# Altium PCB Copy of NaiS802HD_0.6.PcbDoc (part 1 of 2)
Units mm, origin at the board's own origin, x right, y up, seen from the top; angles counter-clockwise.
Board outline 60.2 x 38 mm, 4 copper layers (Top, INT1, GND, Bottom), stack 0.965 mm thick; 171 components, 226 nets, 680 pads, 225 vias.
Unrouted connection lines stored in the file: 290.
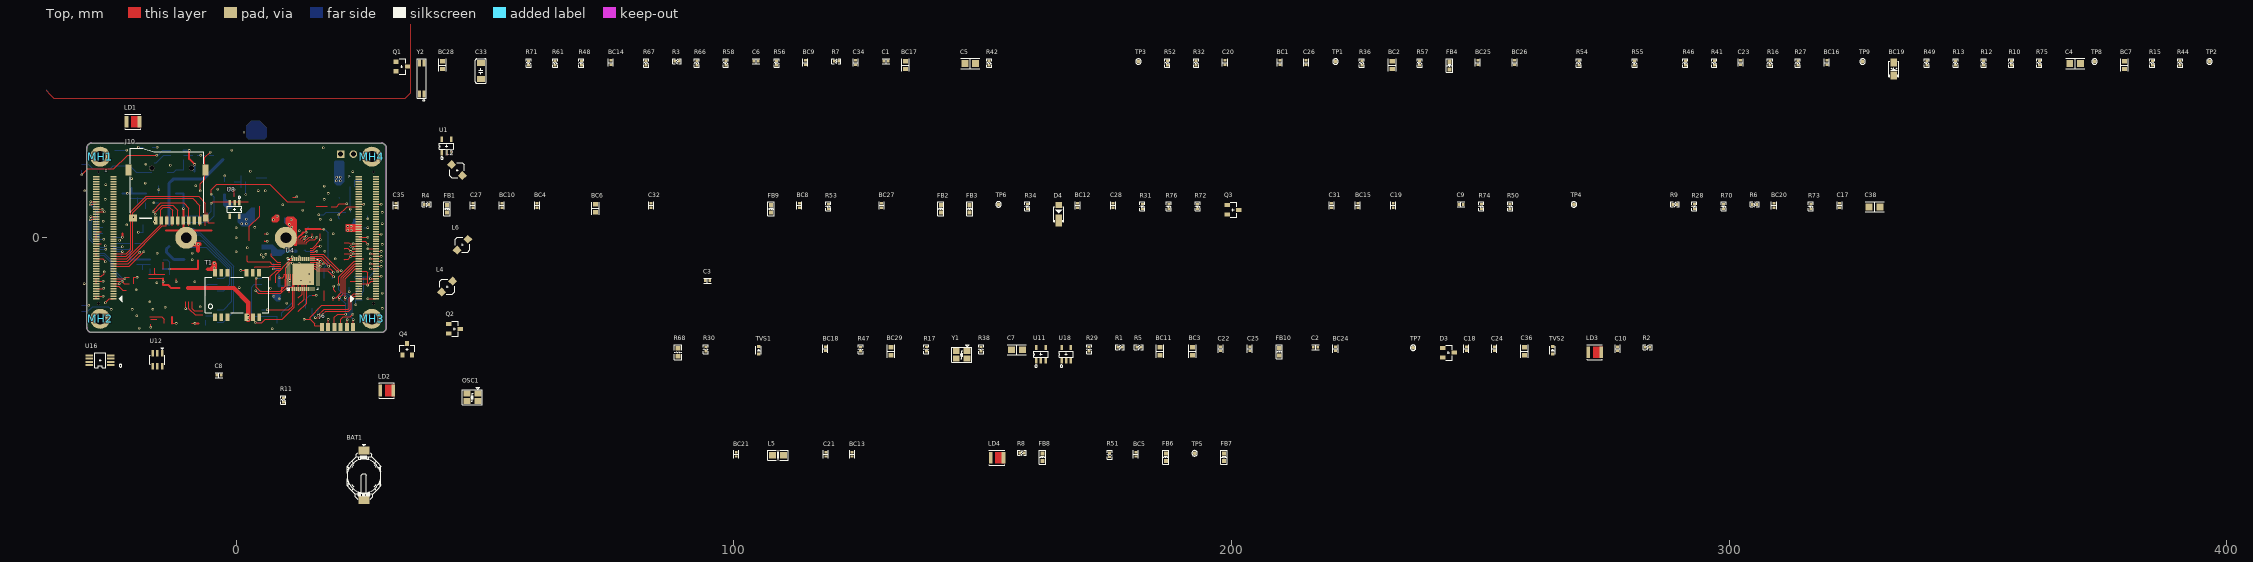
[diagram p0: Top view]
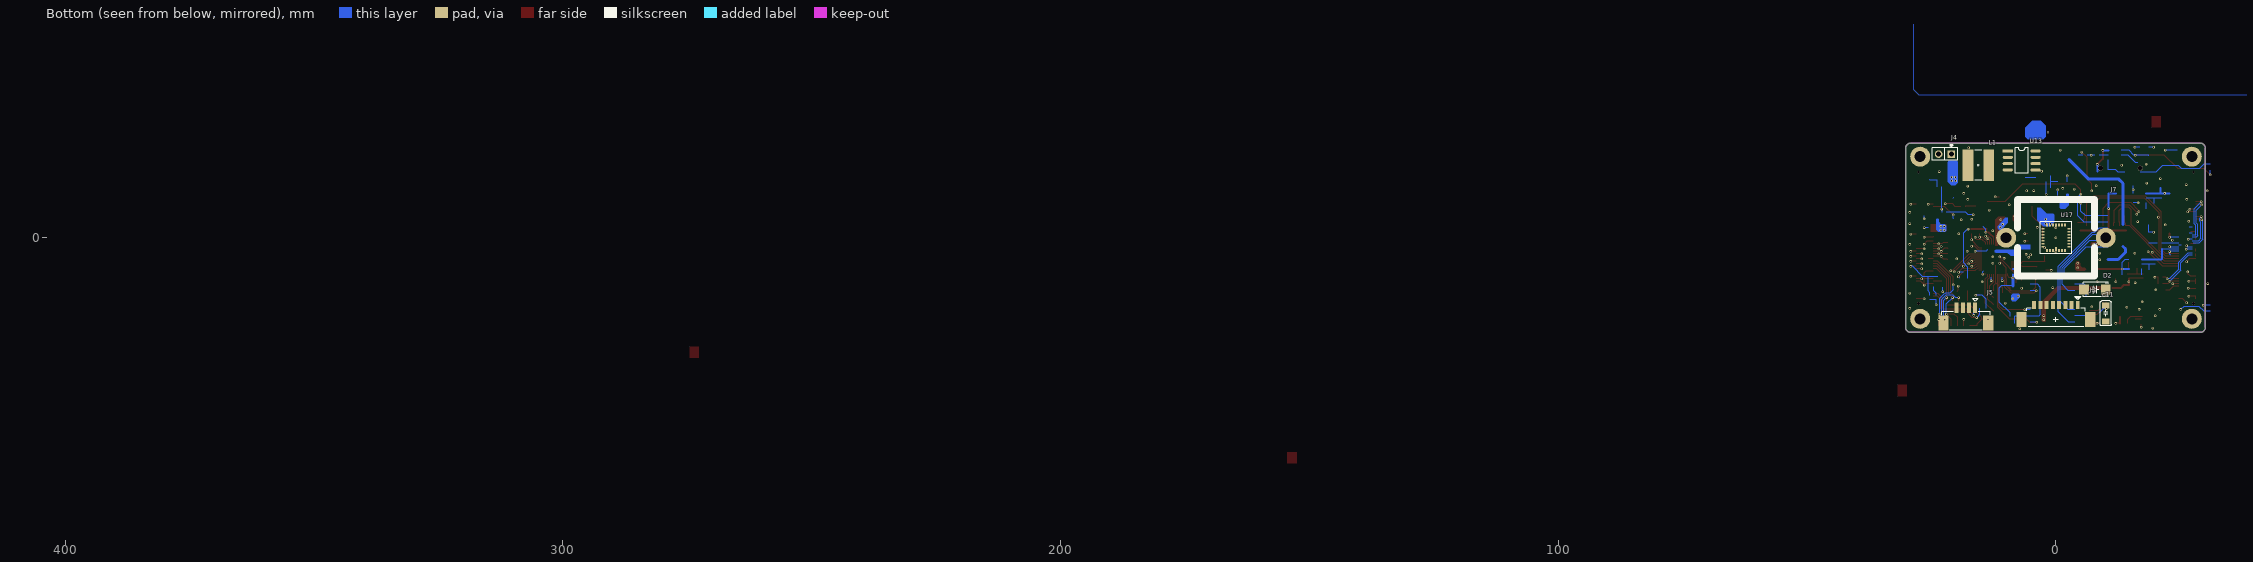
[diagram p1: Bottom view, seen from below]
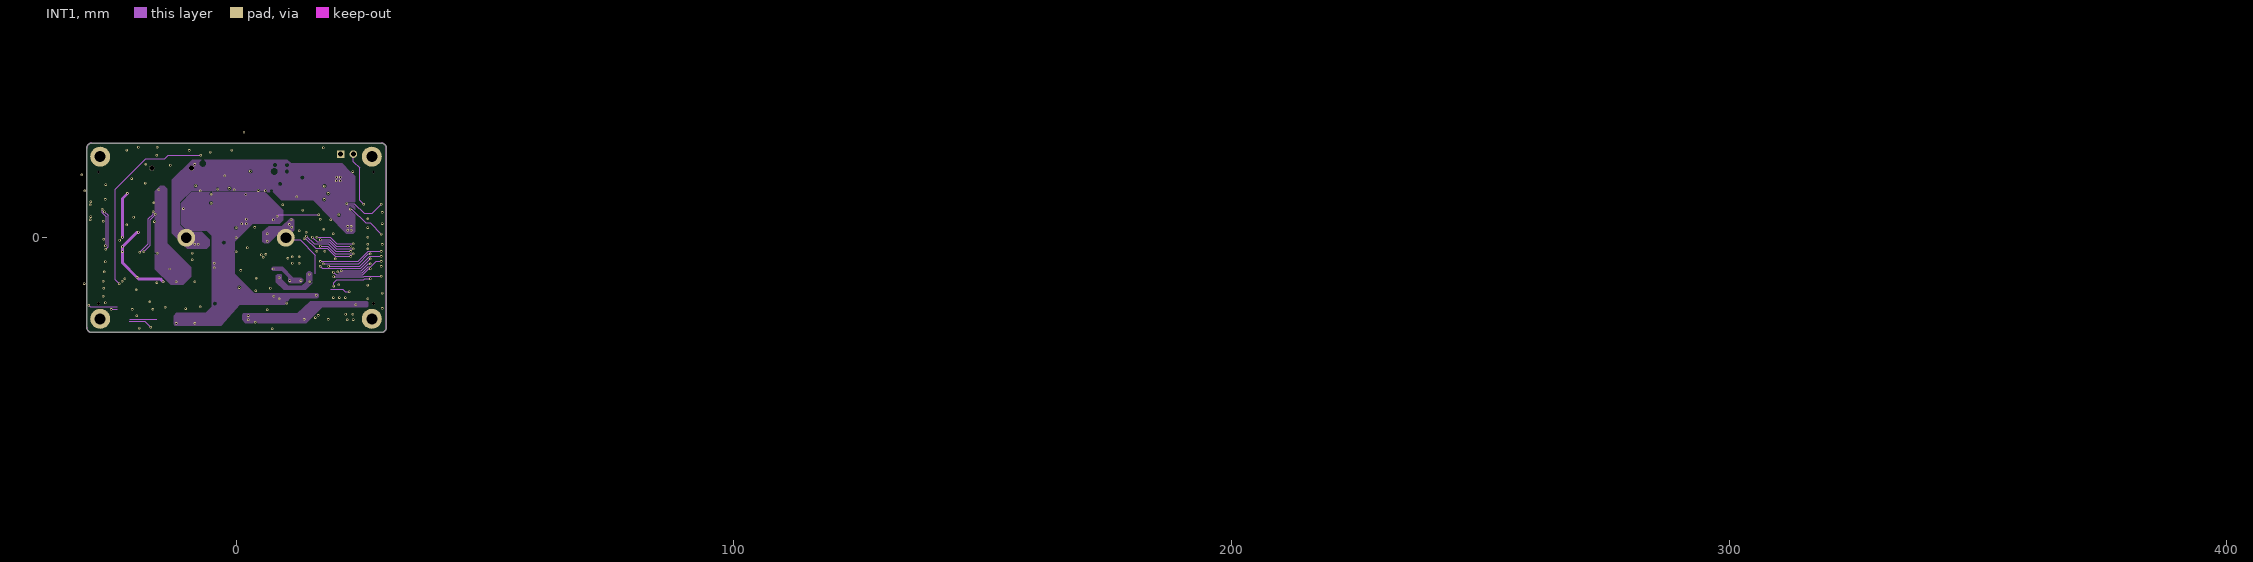
[diagram p2: INT1]

## Layer stack, top to bottom
Solder Mask Top: solder mask 0.0102, Solder Resist, Dk 3.5
Top: signal copper 0.0343
Dielectric 1: dielectric 0.254, FR-4, Dk 4.3
INT1: signal copper 0.0343
Dielectric2: dielectric 0.254, FR-4, Dk 4.3
GND: signal copper 0.0343
Dielectric4: dielectric 0.32, FR-4, Dk 4.8
Bottom: signal copper 0.0343
Solder Mask Bottom: solder mask 0.0102, Solder Resist, Dk 3.5

## Board outline
-30,-18 -30,18 cw(c-29,18) -29,19 29.2,19 cw(c29.2,18) 30.2,18 30.2,-18 cw(c29.2,-18) 29.2,-19 -29,-19 cw(c-29,-18)

## Design rules (kind name [scope] priority, off if disabled: settings)
Clearance Clearance_6 [InNet('+12V') or InNet('N21617464')] p1: gap=0.4 ignorepadtopadclearanceinfootprint=FALSE
Clearance Clearance_5 [InComponent('U4') or InComponent('J7')] p2: gap=0.16 ignorepadtopadclearanceinfootprint=FALSE
Clearance Clearance_4 [(InComponent('MH1') OR InComponent('MH2') OR InComponent('MH3') OR InComponent('MH4')) vs OnLayer('Keep-Out Layer')] p3: gap=0 ignorepadtopadclearanceinfootprint=FALSE
Clearance Clearance_3 [HasFootprint('RP-4_1005')] p4: gap=0.127 ignorepadtopadclearanceinfootprint=FALSE except(0: Arc-Hole Track-Hole SMDPad-Hole THPad-Hole Via-Hole Fill-Hole Poly-Hole Region-Hole Text-Hole)
Clearance Clearance_2 [OnLayer('Keep-Out Layer') vs InNet('GND')] p5: gap=0.1 ignorepadtopadclearanceinfootprint=FALSE except(0: Arc-Hole Track-Hole SMDPad-Hole THPad-Hole Via-Hole Fill-Hole Poly-Hole Region-Hole Text-Hole)
Clearance Clearance_1 [IsVia] p6: gap=0.1 ignorepadtopadclearanceinfootprint=FALSE except(0: Arc-Hole Track-Hole SMDPad-Hole THPad-Hole Via-Hole Fill-Hole Poly-Hole Region-Hole Text-Hole)
Clearance [All] p7: gap=0.2 ignorepadtopadclearanceinfootprint=FALSE
ComponentClearance [OnLayer('Bottom')] p1: gap=0.01 collisioncheckmode=3 verticalgap=0 showdistances=FALSE
DiffPairsRouting [All] p1: maxlimit=0.254 minlimit=0.2 mostfreqgap=0.254 toplayer_prefgap=0.2 toplayer_minwidth=0.2 toplayer_maxwidth=0.381 toplayer_prefwidth=0.254 midlayer1_mingap=0.254 midlayer1_minwidth=0.381 midlayer1_maxwidth=0.381 midlayer1_prefwidth=0.381 midlayer2_mingap=0.254 midlayer2_minwidth=0.381 midlayer2_maxwidth=0.381 midlayer2_prefwidth=0.381 bottomlayer_prefgap=0.2 bottomlayer_minwidth=0.2 bottomlayer_maxwidth=0.381 bottomlayer_prefwidth=0.254 maxuncoupledlength=12.7
HoleSize [All] p1: absolutevalues=TRUE maxlimit=5 minlimit=0.25 maxpercent=80.000 minpercent=20.000
HoleToHoleClearance [All] p1: gap=0.2 allowstackedmicrovias=TRUE
MinimumSolderMaskSliver [All] p1: minsoldermaskwidth=0
PermittedLayers [All] p1: toplayerpermitted=TRUE bottomlayerpermitted=TRUE
PlaneClearance [InNet('GND')] p1: clearance=0.508
PlaneConnect "Power Plane Connect Style - pads with no thermal" [(Name='J10-0') Or (Name='J10-0/2') Or (Name='J11-0') Or (Name='J11-0/2') Or (Name='J12-9') Or (Name='J12-10') Or (Name='J4-13') Or (Name='J4-14') Or (Name='J5-7') Or (Name='J9-15') Or (Name='J9-16') Or (Name='SW1-5') Or (Name='SW1-6')] p1: planeconnectstyle=NoConnect reliefexpansion=0.508 reliefentries=4 reliefconductorwidth=0.254 reliefairgap=0.254 // PAD - No Thermal Connect Rule
PlaneConnect [All] p2: planeconnectstyle=Relief reliefexpansion=0.508 reliefentries=4 reliefconductorwidth=0.254 reliefairgap=0.254
PolygonConnect [All] p1: connectstyle=Direct reliefconductorwidth=0.254 reliefentries=4 polygonreliefangle="90 Angle" airgapwidth=0.1
RoutingVias [All] p1: holewidth=0.25 width=0.5 viastyle="Through Hole" minholewidth=0.25 minwidth=0.5 maxholewidth=0.25 maxwidth=0.5
SilkToSilkClearance [All] p1: silktosilkclearance=0
SilkToSolderMaskClearance [IsPad] p1: minsilkscreentomaskgap=0 clearancetoexposedcopper=TRUE
SolderMaskExpansion [All] p1: expansion=0.1
Width Width_1 [(InNet('VDD_3.3V') OR InNet('AVDD') OR InNet('OVDD') OR InNet('DVDD'))] p1: maxlimit=2 minlimit=0.2 preferedwidth=2
Width [All] p2: maxlimit=1 minlimit=0.1 preferedwidth=0.2
21 further rules are at their usual default settings.

## Components (designator, comment, footprint, x,y, rotation, side; value= is the part's Value field where it differs from the comment)
BAT1 "CN048S-0005//SMD_BAT_HOLDER" BAT-CN048S 25.7,-47.7 r0 top
BC1 "0.1uF" CS-1005 209.701,35.202 r90 top
BC2 "0.1uF" CS-1608 232.301,34.702 r90 top
BC3 "1uF" CS-1608 192.201,-22.798 r90 top
BC4 "0.1uF" CS-1005 60.502,6.502 r90 top
BC5 "0.1uF" CS-1005 180.801,-43.498 r90 top
BC6 "10uF" CS-1608 72.202,5.902 r90 top
BC7 "10uF" CS-1608 379.401,34.702 r90 top
BC8 "0.1uF" CS-1005 113.202,6.502 r90 top
BC9 "0.1uF" CS-1005 114.402,35.202 r90 top
BC10 "0.1uF" CS-1005 53.402,6.502 r90 top
BC11 "10uF" CS-1608 185.601,-22.798 r90 top
BC12 "0.1uF" CS-1005 169.102,6.502 r90 top
BC13 "0.1uF" CS-1005 123.801,-43.498 r90 top
BC14 "0.1uF" CS-1005 75.302,35.202 r90 top
BC15 "0.1uF" CS-1005 225.401,6.502 r90 top
BC16 "0.1uF" CS-1005 319.601,35.202 r90 top
BC17 "10uF" CS-1608 134.502,34.702 r90 top
BC18 "1uF" CS-1005 118.401,-22.298 r90 top
BC19 "22uF" CTS-3216 333.101,33.902 r90 top
BC20 "1uF" CS-1005 309.001,6.502 r90 top
BC21 "0.1uF" CS-1005 100.501,-43.498 r90 top
BC24 "1uF" CS-1005 220.901,-22.298 r90 top
BC25 "1uF" CS-1005 249.501,35.202 r90 top
BC26 "0.1uF" CS-1005 256.901,35.202 r90 top
BC27 "0.1uF-1005" CS-1005 129.702,6.502 r90 top
BC28 "0.1uF" CS-1608 41.502,34.702 r90 top
BC29 "1uF" CS-1608 131.601,-22.798 r90 top
C1 "0.1uF" CS-1005 130.602,35.502 r0 top
C2 "1nF/NI" CS-1005 216.901,-21.998 r0 top
C3 "10nF" CS-1005 94.7,-8.6 r0 top
C4 "22uF-2012-6.3V" CS-2012 369.501,35.002 r0 top
C5 "22uF-2012-6.3V" CS-2012 147.502,35.002 r0 top
C6 "22pF" CS-1005 104.502,35.502 r0 top
C7 "22uF-6.3V" CS-2012 156.901,-22.498 r0 top
C8 "0.1uF" CS-1005 -3.45,-27.6 r0 top
C9 "0.1uF" CS-1005 246.101,6.702 r0 top
C10 "3.3nF" CS-1005 277.601,-22.298 r90 top
c11 "4.7uF-25V-3216" C3216 -10,-15.2 r270 bottom
C17 "12pF" CS-1005 322.201,6.502 r90 top
C18 "12pF" CS-1005 247.201,-22.298 r90 top
C19 "0.1uF" CS-1005 232.501,6.502 r90 top
C20 "0.1uF" CS-1005 198.702,35.202 r90 top
C21 "0.1uF" CS-1005 118.501,-43.498 r90 top
C22 "0.1uF" CS-1005 197.801,-22.298 r90 top
C23 "1uF" CS-1005 302.301,35.202 r90 top
C24 "1uF" CS-1005 252.801,-22.298 r90 top
C25 "1uF" CS-1005 203.701,-22.298 r90 top
C26 "18pF" CS-1005 215.001,35.202 r90 top
C27 "10nF" CS-1005 47.602,6.502 r90 top
C28 "22pF" CS-1005 176.202,6.502 r90 top
C31 "10nF" CS-1005 220.101,6.502 r90 top
C32 "1uF" CS-1005 83.402,6.502 r90 top
C33 "4.7uF-25V-3216" C3216 49.202,33.502 r90 top
C34 "220nF" CS-1005 124.502,35.202 r90 top
C35 "0.1uF" CS-1005 32.102,6.502 r90 top
C36 "22uF" CS-1608 258.901,-22.798 r90 top
C38 "22uF-6.3V" CS-2012 329.201,6.202 r0 top
D2 "RB051L-40" SOD-106 -7.8,-10.4 r180 bottom
D3 "BAT54A" SOT-23 243.601,-23.098 r0 top
D4 "DFLS140" PowerDI123 165.302,4.702 r90 top
FB1 "220R" LS-1608 42.402,5.802 r90 top
FB2 "220R" LS-1608 141.602,5.802 r90 top
FB3 "220R" LS-1608 147.402,5.802 r90 top
FB4 "220R" LS-1608 243.801,34.602 r90 top
FB6 "220R" LS-1608 186.801,-44.098 r90 top
FB7 "220R//NI" LS-1608 198.5,-44.098 r90 top
FB8 "220R//NI" LS-1608 162.001,-44.098 r90 top
FB9 "220R//NI" LS-1608 107.502,5.802 r90 top
FB10 "220R//NI" LS-1608 209.601,-22.898 r90 top
J1 "LB222-G100S-BOR" ? 26.37,0 r180 top locked
J2 "LB208-G100P-BOR" BTB2X50-050-M-SMD -26.37,0 r180 top locked
J3 "12505WR-08" 12505WR-8P 0,-15 r180 bottom
J4 "PH-2PSM//NI" PH-2PSM 22.3,16.8 r270 bottom
J5 "12505WR-4P" 12505WS-4P 18.1,-15.6 r180 bottom
J6 "6pin 2.54mm//NI" TP_HEADER_6 20.375,-17.9 r0 top
J7 "Lens Holder" LENS_HOLDER_C_SQUARE 0,0 r180 bottom
J10 "112J-TXAR-R" CON_u-SD -16.11,3.487 r0 top
L1 "CDRH5D18NP-100NC-10uH" CDRH5D18NP 15.6,14.6 r180 bottom
L2 "CDRH2D14NP-2R2NC" CDRH2D14NP 44.4,13.6 r90 top
L4 "2.2uH/2.6A" CDRH2D14NP 42.4,-9.8 r0 top
L5 "10uH" LS-2012 108.901,-43.698 r0 top
L6 "CDRH2D14NP-2R2NC" CDRH2D14NP 45.5,-1.4 r0 top
LD1 "LED3030" LED-3030 -20.7,23.3 r0 top
LD2 "LED3030" LED-3030 30.3,-30.7 r0 top
LD3 "LED3030" LED-3030 273.001,-22.998 r0 top
LD4 "LED3030" LED-3030 152.901,-44.198 r0 top
MH1 "4.04pi" VA-2.2 -27.29,16.29 r0 top locked
MH2 "4.04pi" VA-2.2 -27.29,-16.29 r0 top locked
MH3 "4.04pi" VA-2.2 27.29,-16.29 r0 top locked
MH4 "4.04pi" VA-2.2 27.29,16.29 r0 top locked
OSC1 "24Mhz-SX32-1.8V" SX-32 47.5,-32 r0 top
Q1 "MMBT6427" SOT-23 33.302,34.402 r0 top
Q2 "MMBT6427" SOT-23 43.9,-18.3 r0 top
Q3 "MMBT6427" SOT-23 200.302,5.602 r0 top
Q4 "MMBT6427" SOT-23 34.4,-22.4 r90 top
R1 "2K" RS-1005 177.601,-21.998 r0 top
R2 "2K" RS-1005 283.601,-21.998 r0 top
R3 "10K" RS-1005 88.602,35.502 r0 top
R4 "10K" RS-1005 38.302,6.702 r0 top
R5 "10K" RS-1005 181.401,-21.998 r0 top
R6 "10K" RS-1005 305.101,6.702 r0 top
R7 "0" RS-1005 120.602,35.502 r0 top
R8 "4.7K" RS-1005 157.901,-43.198 r0 top
R9 "4.7K" RS-1005 289.101,6.702 r0 top
R10 "4.7K" RS-1005 356.701,35.102 r90 top
R11 "100K" RS-1005 9.5,-32.6 r90 top
R12 "45K_1%" RS-1005 351.101,35.102 r90 top
R13 "150K, 1%" RS-1005 345.501,35.102 r90 top
R15 "33.3K, 1%" RS-1005 385.001,35.102 r90 top
R16 "2.2K" RS-1005 308.201,35.102 r90 top
R17 "10K_1%" RS-1005 138.701,-22.398 r90 top
R27 "4.7K" RS-1005 313.801,35.102 r90 top
R28 "4.7K" RS-1005 293.001,6.302 r90 top
R29 "4.7K" RS-1005 171.401,-22.398 r90 top
R30 "4.7K" RS-1005 94.401,-22.398 r90 top
R31 "4.7K" RS-1005 182.102,6.302 r90 top
R32 "2.49K/1%" RS-1005 192.902,35.102 r90 top
R34 "4.7K" RS-1005 159.002,6.302 r90 top
R36 "4.7K" RS-1005 226.201,35.102 r90 top
R38 "4.7K" RS-1005 149.701,-22.398 r90 top
R41 "10K" RS-1005 297.001,35.102 r90 top
R42 "4.7K" RS-1005 151.302,35.102 r90 top
R44 "40.2K" RS-1005 390.601,35.102 r90 top
R46 "10K" RS-1005 291.201,35.102 r90 top
R47 "10K" RS-1005 125.501,-22.398 r90 top
R48 "4.7K" RS-1005 69.402,35.102 r90 top
R49 "NC" RS-1005 339.701,35.102 r90 top
R50 "4.7K" RS-1005 256.001,6.302 r90 top
R51 "75" RS-1005 175.501,-43.598 r90 top
R52 "75" RS-1005 187.102,35.102 r90 top
R53 "4.7K" RS-1005 119.002,6.302 r90 top
R54 "4.7K" RS-1005 269.801,35.102 r90 top
R55 "22" RS-1005 281.001,35.102 r90 top
R56 "36.5K_F" RS-1005 108.602,35.102 r90 top
R57 "30.1K_F" RS-1005 237.801,35.102 r90 top
R58 "150K, 1%" RS-1005 98.402,35.102 r90 top
R61 "75K,1%" RS-1005 64.102,35.102 r90 top
R66 "30.1K_F" RS-1005 92.602,35.102 r90 top
R67 "33" RS-1005 82.402,35.102 r90 top
R68 "1_F" RS-1608 88.801,-22.998 r90 top
R70 "10.2K/1%" RS-1005 298.901,6.302 r90 top
R71 "10K" RS-1005 58.802,35.102 r90 top
R72 "10K" RS-1005 193.202,6.302 r90 top
R73 "10K" RS-1005 316.401,6.302 r90 top
R74 "10K" RS-1005 250.201,6.302 r90 top
R75 "10K" RS-1005 362.301,35.102 r90 top
R76 "10K" RS-1005 187.402,6.302 r90 top
T1 "TRC41604NL" TRC41604NL 0.2,-11.5 r0 top
TP1 "TPS" TP_0.8_SMD 220.901,35.402 r90 top
TP2 "TPS" TP_0.8_SMD 396.501,35.402 r90 top
TP3 "TPS" TP_0.8_SMD 181.302,35.402 r90 top
TP4 "TPS" TP_0.8_SMD 268.801,6.702 r90 top
TP5 "TPS" TP_0.8_SMD 192.601,-43.298 r90 top
TP6 "TPS" TP_0.8_SMD 153.202,6.702 r90 top
TP7 "TPS" TP_0.8_SMD 236.501,-22.098 r90 top
TP8 "TPS" TP_0.8_SMD 373.401,35.402 r90 top
TP9 "TPS" TP_0.8_SMD 326.801,35.402 r90 top
TVS1 "ESD5B5.0ST1G" SOD-523 105.001,-22.598 r90 top
TVS2 "ESD5B5.0ST1G" SOD-523 264.501,-22.598 r90 top
U1 "AME5253-AEVADJ" SOT-23-5P 42.3,18.4 r0 top
U4 "YT8521SH" QFN48_6x6 13.5,-7.3 r90 top
U8 "SGM2036-2.8YN5G/TR" SOT-23-5P -0.3,5.7 r180 top
U11 "SGM2036-1.2YN5G/TR" SOT-23-5P 161.701,-23.398 r0 top
U12 "TPS61165DBVR" SOT23-6 -15.8,-24.5 r0 top
U13 "MP1482" SOIC-8 6.9,15.5 r270 bottom
U16 "DS1339U-33" TSSOP8-M -27.3,-24.6 r90 top
U17 "IMX219PLCC" IMX219PLCC 0,0 r180 bottom
U18 "AME5253-AEVADJ" SOT-23-5P 166.801,-23.398 r0 top
Y1 "25MHz-S20P-SX32" SX-32 145.801,-23.498 r0 top
Y2 "32.768KHz-MC-146-7pF" XTS-MC-146 37.302,32.002 r90 top

## Footprints (in the part's own frame and the unit in brackets; to place one, negate y for a bottom-side part, rotate by r counter-clockwise, add the part's x,y. Pads: shape width x height; smd on the part's side, far side on the other; paste and mask are expansions set on the pad)
12505WR-8P [mm]
  rect 0.8x1.6 smd: 1(4.375,1.45) 2(3.125,1.45) 3(1.875,1.45) 4(0.625,1.45) 5(-0.625,1.45) 6(-1.875,1.45) 7(-3.125,1.45) 8(-4.375,1.45)
  rect 2.1x3 smd: 9(-6.925,-1.45) 10(6.925,-1.45)
  silkscreen extent -5.87,-2.85 5.87,3.12
12505WS-4P [mm]
  rect 0.8x2.1 smd: 1(1.875,1.55) 2(0.625,1.55) 3(-0.625,1.55) 4(-1.875,1.55)
  rect 2.1x3 smd: 5(-4.5,-1.55) 6(4.5,-1.55)
  silkscreen extent -4.87,-2.95 4.87,3.3
BAT-CN048S [mm]
  rect 2.2x1.6 smd: 1(0,4.975) 2(0,-4.975)
  silkscreen extent -3.4,-4.85 3.4,6.25, body extent -3.39,-5.22 3.31,5.18, height 2.8
BTB2X50-050-M-SMD [mm]
  rect 1.25x0.3 smd: 1(-1.725,12.25) 2(1.725,12.25) 3(-1.725,11.75) 4(1.725,11.75) 5(-1.725,11.25) 6(1.725,11.25) 7(-1.725,10.75) 8(1.725,10.75) 9(-1.725,10.25) 10(1.725,10.25) 11(-1.725,9.75) 12(1.725,9.75) 13(-1.725,9.25) 14(1.725,9.25) 15(-1.725,8.75) 16(1.725,8.75) 17(-1.725,8.25) 18(1.725,8.25) 19(-1.725,7.75) 20(1.725,7.75) 21(-1.725,7.25) 22(1.725,7.25) 23(-1.725,6.75) 24(1.725,6.75) 25(-1.725,6.25) 26(1.725,6.25) 27(-1.725,5.75) 28(1.725,5.75) 29(-1.725,5.25) 30(1.725,5.25) 31(-1.725,4.75) 32(1.725,4.75) 33(-1.725,4.25) 34(1.725,4.25) 35(-1.725,3.75) 36(1.725,3.75) 37(-1.725,3.25) 38(1.725,3.25) 39(-1.725,2.75) 40(1.725,2.75) 41(-1.725,2.25) 42(1.725,2.25) 43(-1.725,1.75) 44(1.725,1.75) 45(-1.725,1.25) 46(1.725,1.25) 47(-1.725,0.75) 48(1.725,0.75) 49(-1.725,0.25) 50(1.725,0.25) 51(-1.725,-0.25) 52(1.725,-0.25) 53(-1.725,-0.75) 54(1.725,-0.75) 55(-1.725,-1.25) 56(1.725,-1.25) 57(-1.725,-1.75) 58(1.725,-1.75) 59(-1.725,-2.25) 60(1.725,-2.25) 61(-1.725,-2.75) 62(1.725,-2.75) 63(-1.725,-3.25) 64(1.725,-3.25) 65(-1.725,-3.75) 66(1.725,-3.75) 67(-1.725,-4.25) 68(1.725,-4.25) 69(-1.725,-4.75) 70(1.725,-4.75) 71(-1.725,-5.25) 72(1.725,-5.25) 73(-1.725,-5.75) 74(1.725,-5.75) 75(-1.725,-6.25) 76(1.725,-6.25) 77(-1.725,-6.75) 78(1.725,-6.75) 79(-1.725,-7.25) 80(1.725,-7.25) 81(-1.725,-7.75) 82(1.725,-7.75) 83(-1.725,-8.25) 84(1.725,-8.25) 85(-1.725,-8.75) 86(1.725,-8.75) 87(-1.725,-9.25) 88(1.725,-9.25) 89(-1.725,-9.75) 90(1.725,-9.75) 91(-1.725,-10.25) 92(1.725,-10.25) 93(-1.725,-10.75) 94(1.725,-10.75) 95(-1.725,-11.25) 96(1.725,-11.25) 97(-1.725,-11.75) 98(1.725,-11.75) 99(-1.725,-12.25) 100(1.725,-12.25)
  round 0.5 hole 0.6: 1(1.25,13.2) 1(1.25,-13.2)
  silkscreen extent -3.47,11.65 -2.88,12.85
C3216 [mm]
  rect 1.2x1.6 smd: 1(-1.6,0) 2(1.6,0)
  silkscreen extent -2.5,-1.1 2.5,1.1
CDRH2D14NP [mm]
  rect 1.3x1.3 smd rot 45: 1(1.1,1.1) 2(-1.1,-1.1)
  Top pour cut-out: -1.484,1.116 -1.504,-0.621 -0.625,-1.5 1.025,-1.5 1.5,-1.025 1.5,0.7 0.7,1.5 -1.1,1.5
  silkscreen extent -1.5,-1.5 1.5,1.5
CDRH5D18NP [mm]
  rect 2.15x6.3 smd: 1(2.075,0) 2(-2.075,0)
  silkscreen extent -0.7,-3 0.7,3
CON_u-SD [mm]
  rect 0.7x1.6 smd: 1(0,0) 2(1.105,0) 3(2.201,0) 4(3.303,0) 5(4.407,0) 6(5.504,0) 7(6.6,0) 8(7.705,0) CD(8.801,0)
  rect 1.1x1.4 smd: 9(10.006,0.499)
  rect 1.6x1.4 smd: 10(-4.596,0.508)
  rect 1.2x2.2 smd: 11(10.012,10.108) 12(-5.497,10.108)
  round 1 hole 1: 13(7.198,10.509) 14(-0.79,10.513)
  silkscreen extent -5.1,0.48 9.6,14.51
CS-1005 [mm]
  rect 0.5x0.6 smd: 1(-0.45,0) 2(0.45,0)
  silkscreen extent -0.76,-0.51 0.76,0.51
CS-1608 [mil]
  rect 35x40 smd: 1(-31.5,0) 2(31.5,0)
  silkscreen extent -50,-30 50,30
CS-2012 [mil]
  rect 55x55 smd: 1(-42.5,0) 2(42.5,0)
  silkscreen extent -75,-40 75,40
CTS-3216 [mil]
  rect 63x51 smd: 1(-50,0) 2(50,0)
  silkscreen extent -63,-39 63,39
IMX219PLCC [mm]
  rect 0.35x1 smd: 1(0,-2.4)
  rect 0.35x0.6 smd: 2(0.6,-2.6) 3(1.2,-2.6) 4(1.8,-2.6) 12(1.8,2.6) 13(1.2,2.6) 14(0.6,2.6) 15(0,2.6) 16(-0.6,2.6) 17(-1.2,2.6) 18(-1.8,2.6) 26(-1.8,-2.6) 27(-1.2,-2.6) 28(-0.6,-2.6)
  rect 0.6x0.35 smd: 5(2.65,-1.8) 6(2.65,-1.2) 7(2.65,-0.6) 8(2.65,0) 9(2.65,0.6) 10(2.65,1.2) 11(2.65,1.8) 19(-2.65,1.8) 20(-2.65,1.2) 21(-2.65,0.6) 22(-2.65,0) 23(-2.65,-0.6) 24(-2.65,-1.2) 25(-2.65,-1.8)
  silkscreen extent -3.2,-3.25 3.2,3.25
LED-3030 [mm]
  rect 0.725x2.35 smd: 1(-1.3,0) 2(1.3,0)
  Top region: -0.375,-1.175 1.55,-1.175 1.55,1.175 -0.375,1.175
  silkscreen extent -1.53,-1.53 1.53,1.53
LENS_HOLDER_C_SQUARE [mm]
  round 4 / inner round 3.6 / far side round 4.4 hole 2.2: 1(-10,0) 2(10,0)
  silkscreen extent -7.7,-7.7 7.7,7.7
LS-1608 [mil]
  rect 32x32 smd: 1(-30,0) 2(30,0)
  silkscreen extent -55,-25 55,25
LS-2012 [mil]
  rect 55x55 smd: 1(-42.5,0) 2(42.5,0)
  silkscreen extent -80,-40 80,40
PH-2PSM [mil]
  rect 60x60 hole 39.37: 1(0,50)
  round 60 hole 39.37: 2(0,-50)
  silkscreen extent -80,-100 50,100
PowerDI123 [mm]
  rect 1.2x1.25 smd: 1(1.85,0)
  rect 2.4x1.25 smd: 2(-1.225,0)
  silkscreen extent -1.45,-0.97 1.55,0.98
QFN48_6x6 [mm]
  rrect0% 0.8x0.22 smd: 1(-3,2.2) 2(-3,1.8) 3(-3,1.4) 4(-3,1) 5(-3,0.6) 6(-3,0.2) 7(-3,-0.2) 8(-3,-0.6) 9(-3,-1) 10(-3,-1.4) 11(-3,-1.8) 12(-3,-2.2) 25(3,-2.2) 26(3,-1.8) 27(3,-1.4) 28(3,-1) 29(3,-0.6) 30(3,-0.2) 31(3,0.2) 32(3,0.6) 33(3,1) 34(3,1.4) 35(3,1.8) 36(3,2.2)
  rrect0% 0.22x0.8 smd: 13(-2.2,-3) 14(-1.8,-3) 15(-1.4,-3) 16(-1,-3) 17(-0.6,-3) 18(-0.2,-3) 19(0.2,-3) 20(0.6,-3) 21(1,-3) 22(1.4,-3) 23(1.8,-3) 24(2.2,-3) 37(2.2,3) 38(1.8,3) 39(1.4,3) 40(1,3) 41(0.6,3) 42(0.2,3) 43(-0.2,3) 44(-0.6,3) 45(-1,3) 46(-1.4,3) 47(-1.8,3) 48(-2.2,3)
  rect 4.3x4.3 smd: M1(0,0)
  silkscreen extent -3.22,-3 3,3.22
RS-1005 [mm]
  rect 0.5x0.6 smd: 1(-0.45,0) 2(0.45,0)
  silkscreen extent -0.89,-0.51 0.89,0.51
RS-1608 [mil]
  rect 35x40 smd: 1(-31.5,0) 2(31.5,0)
  silkscreen extent -60,-30 60,30
SOD-106 [mm]
  rrect0% 2x2 smd: 1(-2.2,0) 2(2.2,0)
  silkscreen extent -2.3,-1.45 2.7,1.45
SOD-523 [mm]
  rect 0.6x0.7 smd: 1(0.71,0) 2(-0.71,0)
  silkscreen extent -0.8,-0.55 0.8,0.55
SOIC-8 [mil]
  rect 24x80 smd: 1(-76.34,-109.45)
  oval 24x80 smd: 2(-26.34,-109.45) 3(23.66,-109.45) 4(73.66,-109.45) 5(73.66,110.55) 6(23.66,110.55) 7(-26.34,110.55) 8(-76.34,110.55)
  silkscreen extent -101,-49 99,51
SOT23-6 [mm]
  rect 0.508x1.27 smd: 1(0.95,1.3) 2(0,1.3) 3(-0.95,1.3) 4(-0.95,-1.3) 5(0,-1.3) 6(0.95,-1.3)
  silkscreen extent -1.52,-0.89 1.52,2.4
SOT-23 [mil]
  rect 42x32 smd: 1(-45.45,37.75) 2(-45.45,-37.35) 3(44.85,0.2)
  silkscreen extent -20,-60 30,60
SOT-23-5P [mm]
  rect 0.5x1.1 smd: 1(-0.95,-1.35) 2(0,-1.35) 3(0.95,-1.35) 4(0.95,1.35) 5(-0.95,1.35)
  silkscreen extent -1.45,-2.65 1.45,0.6
SX-32 [mm]
  rect 1.4x1.2 smd: 1(1.1,0.75) 2(-1.1,0.75) 3(-1.1,-0.75) 4(1.1,-0.75)
  silkscreen extent -2,-1.5 2,2
TP_0.8_SMD [mm]
  round 0.8 smd: 1(0,0)
  silkscreen extent -0.56,-0.56 0.56,0.56
TP_HEADER_6 [mm]
  rect 0.8x1.6 smd: 1(-3.125,0) 2(-1.875,0) 3(-0.625,0) 4(0.625,0) 5(1.875,0) 6(3.125,0)
TRC41604NL [mm]
  rect 0.76x1.52 smd: 1(-4.436,-4.445) 2(-3.168,-4.445) 3(-1.898,-4.445) 6(1.912,-4.445) 7(3.182,-4.445) 8(4.452,-4.445) 9(4.438,4.445) 10(3.168,4.445) 11(1.898,4.445) 14(-1.912,4.445) 15(-3.182,4.445) 16(-4.452,4.445)
  silkscreen extent -6.35,-3.56 6.35,3.56
TSSOP8-M [mm]
  rect 0.4x1.5 smd: 1(-0.975,-2.15) 2(-0.325,-2.15) 3(0.325,-2.15) 4(0.975,-2.15) 5(0.975,2.15) 6(0.325,2.15) 7(-0.325,2.15) 8(-0.975,2.15)
  silkscreen extent -1.5,-4.38 1.5,1.1
VA-2.2 [mm]
  rrect100% 4x4 hole 2.2: 1(0,0)
XTS-MC-146 [mm]
  rect 1.4x0.6 smd: 1(-3.15,-0.42) 2(3.15,-0.42) 3(3.15,0.42) 4(-3.15,0.42)
  silkscreen extent -4.5,-0.9 4,0.9
? [mm]
  rect 1.25x0.3 smd: 1(1.725,12.25) 2(-1.725,12.25) 3(1.725,11.75) 4(-1.725,11.75) 5(1.725,11.25) 6(-1.725,11.25) 7(1.725,10.75) 8(-1.725,10.75) 9(1.725,10.25) 10(-1.725,10.25) 11(1.725,9.75) 12(-1.725,9.75) 13(1.725,9.25) 14(-1.725,9.25) 15(1.725,8.75) 16(-1.725,8.75) 17(1.725,8.25) 18(-1.725,8.25) 19(1.725,7.75) 20(-1.725,7.75) 21(1.725,7.25) 22(-1.725,7.25) 23(1.725,6.75) 24(-1.725,6.75) 25(1.725,6.25) 26(-1.725,6.25) 27(1.725,5.75) 28(-1.725,5.75) 29(1.725,5.25) 30(-1.725,5.25) 31(1.725,4.75) 32(-1.725,4.75) 33(1.725,4.25) 34(-1.725,4.25) 35(1.725,3.75) 36(-1.725,3.75) 37(1.725,3.25) 38(-1.725,3.25) 39(1.725,2.75) 40(-1.725,2.75) 41(1.725,2.25) 42(-1.725,2.25) 43(1.725,1.75) 44(-1.725,1.75) 45(1.725,1.25) 46(-1.725,1.25) 47(1.725,0.75) 48(-1.725,0.75) 49(1.725,0.25) 50(-1.725,0.25) 51(1.725,-0.25) 52(-1.725,-0.25) 53(1.725,-0.75) 54(-1.725,-0.75) 55(1.725,-1.25) 56(-1.725,-1.25) 57(1.725,-1.75) 58(-1.725,-1.75) 59(1.725,-2.25) 60(-1.725,-2.25) 61(1.725,-2.75) 62(-1.725,-2.75) 63(1.725,-3.25) 64(-1.725,-3.25) 65(1.725,-3.75) 66(-1.725,-3.75) 67(1.725,-4.25) 68(-1.725,-4.25) 69(1.725,-4.75) 70(-1.725,-4.75) 71(1.725,-5.25) 72(-1.725,-5.25) 73(1.725,-5.75) 74(-1.725,-5.75) 75(1.725,-6.25) 76(-1.725,-6.25) 77(1.725,-6.75) 78(-1.725,-6.75) 79(1.725,-7.25) 80(-1.725,-7.25) 81(1.725,-7.75) 82(-1.725,-7.75) 83(1.725,-8.25) 84(-1.725,-8.25) 85(1.725,-8.75) 86(-1.725,-8.75) 87(1.725,-9.25) 88(-1.725,-9.25) 89(1.725,-9.75) 90(-1.725,-9.75) 91(1.725,-10.25) 92(-1.725,-10.25) 93(1.725,-10.75) 94(-1.725,-10.75) 95(1.725,-11.25) 96(-1.725,-11.25) 97(1.725,-11.75) 98(-1.725,-11.75) 99(1.725,-12.25) 100(-1.725,-12.25)
  round 0.5 hole 0.6: M1(-1.25,-13.2) M2(-1.25,13.2)
  silkscreen extent 2.75,11.67 3.35,12.87

## Via types
v1: diameter 0.5, hole 0.25, Top to Bottom, 225 vias

## Nets (pads, with @x,y where several pads share a name; then routed paths per layer and width w, separated by ;. In a path a pad name is that pad's centre, name@x,y a point inside that pad or via, vN(x,y) a via of type N, cw(c..) or ccw(c..) an arc to the next point about the centre after c; other vN are vias at no path point)
1.8VCORE: FB10.2 J2.14 J2.16 J2.18 TP2.1 | length 2.4
  Top w0.2: J2.14@-28.095,-9.25 J2.16@-28.095,-8.75 ; J2.18@-28.095,-8.25 J2.16@-28.095,-8.75 ; v1(-26.724,-8.75) J2.16@-28.095,-8.75
1V2: BC25.2 C24.2 U11.5 U17.27
1V8: BC18.2 BC24.2 C23.2 FB8.1 OSC1.4 R53.1 R54.1 R56.2 U17.25 | length 0.1
  Top w0.2: v1(2.3,-2) v1@2.351,-2
1V8_IO67: J1.68
1V8_IO68: J1.70
1V8_IO72: J1.72
1V8_IO73: J1.74
1V8_IO74: J1.76
1V8_IO82: J1.66
1V8_IO92: J2.59
1V8_IO93: J2.61
1V8_IO94: J2.51
1V8_IO95: J2.53
1V8_IO96: J2.57
1V8_IO104: J2.30
1V8_IO105: J2.32
1V8_IO106: J2.26
1V8_IO107: J2.28
1V8_IO118: J2.19
1V8_IO119: J2.21
2V8: BC19.1 BC20.2 C25.2 U8.5 U17.16
3.3VCORE: FB9.2 J2.2 J2.4 TP1.1 | length 1.9
  Top w0.2: J2.2@-28.095,-12.25 J2.4@-28.095,-11.75 v1(-26.724,-11.75)
3V3_IO114: J1.11
3V3_IO115: J1.9
3V3_IO124: J2.9
3V3_IO125: J2.7
3V3_IO126: J2.5
3V3_IO127: J2.3
+1.8V: BC1.1 BC29.2 C28.1 C38.1 FB8.2 FB10.1 J6.1 L6.2 R6.2 R8.2 R9.2 R10.2 R41.1 R46.1 R47.1 R58.2 | length 12.9
  Top w0.2: v1(13.675,-16.415) 14.887,-16.415 ; J6.1@17.275,-17.7 17.266,-17.709 15.775,-17.709 15.775,-17.304 14.887,-16.415 ; 21.978,-13.567 17.242,-13.567 14.887,-15.922 14.887,-16.415
+3.3V: BC3.2 BC27.2 C6.1 C7.1 C35.1 C36.1 FB1.1 FB2.1 FB7.1 FB9.1 J5.1 J10.4 L2.2 R13.2 R44.1 R66.2 R70.2 R71.2 R72.2 R73.2 R74.2 R75.2 R76.2 TVS1.1 U16.8
+5.0V: BC2.2 BC28.2 C4.1 C5.1 C32.1 FB6.1 J1.55 J1.57 J1.59 J1.61 L1.2 L5.2 R1.2 R2.2 R12.1 U1.1 U1.4 U12.1 U18.1 U18.4
  other v1: 22.435,1.53 23.12,1.53 22.435,2.28 23.12,2.28
+12V: C8.1 c11.1 D2.2 R11.1 U13.2 | length 3.1
  Top w0.2: v1(-10.129,-14.222) -10.129,-12.875
  Bottom w0.2: v1(-10.129,-14.222) -9.475,-14.222 -8.775,-14.922 -8.775,-15.025
ADCOUT_C: J2.60
AVDD33: BC7.1 BC8.1 BC9.1 FB2.2 R49.1 U4.1 U4.12
AVDDL_1V2: BC14.1 BC15.1 BC16.1 FB4.2 U4.4 U4.9 U4.47
BCLK_C: J2.63
BOOT_CTL0: J1.79
BOOT_CTL1: D3.2 J1.77 J4.2 | length 11.9
  Top w0.2: J1.77@24.645,6.75 v1(25.645,6.75)
  INT1 w0.2: J4.2@23.57,16.8 23.57,15.312 24.836,14.046 24.836,7.559 v1(25.645,6.75)
BT_RST_IN: J1.50
BT_UART_RX: J2.22
BT_UART_TX: J2.24
BT_WAKE_IN: J1.62
BT_WAKE_OUT: J1.64
CFG_LED1: R3.2 R50.1 U4.36
CFG_LED2: R5.2 R48.2 U4.37
DACIN_C: J2.58
DRIVE_WS2812_3V3: J2.13 R66.1 R67.2 | length 42
  Top w0.2: J2.13@-24.645,-9.25 v1@-23.448,-9.25
  INT1 w0.2: v1(-23.456,-9.258) -24.238,-8.475 -24.238,9.756 -18.105,15.889 -14.289,15.889 -13.578,16.6 v1(-7.095,16.6)
  Bottom w0.2: -7.772,16.6 v1(-7.095,16.6) -6.259,16.6
DVDD33: BC4.1 BC5.1 BC6.1 FB1.2 R48.1 R50.2 U4.30 U4.31
DVDD_RGMII: BC10.1 BC11.1 R27.1 R28.1 R30.1 R42.2 U4.29
DVDDL: BC12.1 FB3.2 U4.22
DVP_D0: J1.91
DVP_D1: J1.94
DVP_D2: J1.93
DVP_D3: J1.82
DVP_D4: J1.86
DVP_D5: J1.96
DVP_D6: J1.95
DVP_D7: J1.84
DVP_D8: J1.98
DVP_D9: J1.97
DVP_D10: J1.100
DVP_D11: J1.88
DVP_D12: J1.92
DVP_D13: J1.90
DVP_D14: J1.99
DVP_D15: J1.81
DVP_DEN: J1.87
DVP_HREF: J1.85
DVP_PCLK: J1.89
DVP_VSYNC: J1.83
EPHY_TRCT: C20.1 R49.2 T1.2 T1.7
ETH_INTB: J1.28 Q3.3 R41.2 | length 11.3
  Top w0.2: J1.28@28.095,-5.75 v1(29.2,-5.75)
  Bottom w0.2: 23.756,-7.796 25.654,-7.796 ; 25.312,-11.568 25.312,-11.021 25.654,-10.678 25.654,-7.796 ; v1(29.2,-5.75) 28.787,-5.75 26.742,-7.796 25.703,-7.796 25.689,-7.796 25.654,-7.796
ETH_RST: J1.18 Q4.2 | length 10.7
  Top w0.2: v1(19.6,-9.7) 19.6,-10.492 19.912,-10.804 ; v1(27,-8.25) J1.18@28.095,-8.25
  INT1 w0.2: v1(19.6,-9.7) 19.6,-9.088 20.264,-8.424 25.654,-8.424 25.828,-8.25 v1(27,-8.25)
FD_SW: C2.1 R7.2
FS_C: J2.62
GND: BAT1.2 BC1.2 BC2.1 BC3.1 BC4.2 BC5.2 BC6.2 BC7.2 BC8.2 BC9.2 BC10.2 BC11.2 BC12.2 BC13.2 BC14.2 BC15.2 BC16.2 BC17.2 BC18.1 BC19.2 BC20.1 BC21.1 BC24.1 BC25.1 BC26.1 BC27.1 BC28.1 BC29.1 C1.1 C2.2 C4.2 C5.2 C7.2 C8.2 C9.2 c11.2 C17.1 C18.1 C19.2 C20.2 C21.2 C22.2 C23.1 C24.1 C25.1 C26.2 C27.1 C31.1 C32.2 C33.2 C34.1 C35.2 C36.2 C38.2 D3.1 J1.2 J1.13 J1.16 J1.17 J1.23 J1.33 J1.42 J1.47 J1.49 J1.51 J1.53 J1.63 J1.65 J1.67 J1.69 J1.71 J1.73 J2.1 J2.8 J2.10 J2.20 J2.34 J2.44 J2.46 J2.56 J2.64 J2.69 J2.70 J2.75 J2.76 J2.81 J2.82 J2.87 J2.88 J2.93 J2.94 J2.99 J2.100 J3.2 J3.9 J3.10 J4.1 J5.4 J5.5 J5.6 J6.2 J7.1 J7.2 J10.6 J10.9 J10.10 J10.11 J10.12 MH1.1 MH2.1 MH3.1 MH4.1 OSC1.2 Q1.2 Q2.2 R15.1 R16.1 R17.1 R29.1 R31.1 R32.1 R34.1 R36.1 R38.1 R57.1 R61.1 R68.2 TVS1.2 TVS2.2 U1.2 U4.M1 U8.2 U11.2 U12.4 U13.4 U16.4 U17.3 U17.6 U17.9 U17.12 U17.15 U17.17 U17.22 U17.24 U17.26 U17.28 U18.2 Y1.2 Y1.4 | length 84.9
  Top w0.2: J2.10@-28.095,-10.25 -26.737,-10.25 -26.639,-10.152 v1(-26.558,-10.152) ; J2.20@-28.095,-7.75 -27.049,-7.75 -26.489,-7.19 -26.489,-6.916 v1(-26.436,-6.864) ; J2.34@-28.095,-4.25 -26.823,-4.25 v1(-26.229,-4.843) ; J2.46@-28.095,-1.25 -27.069,-1.25 ; J2.56@-28.095,1.25 -27.126,1.25 ; v1(-26.229,-13.069) -26.229,-13.05 -25.437,-12.257 -24.652,-12.257 J2.1@-24.645,-12.25 ; v1(-7.159,9.404) -7.159,10.85 -6.27,11.739 -6.27,16.162 ; J10.11@-6.27,14.296 -6.27,16.162 ; -5.765,5.012 -5.765,3.898 -5.585,3.718 -5.585,2.98 -4.386,2.98 -4.364,3.002 ; v1(-5.204,17.228) -6.27,16.162 ; 7.946,-9.079 7.946,-7.384 10.776,-4.554 11.3,-4.554 ; 9.188,-11.077 9.188,-9.979 9.257,-9.91 9.696,-9.91 9.96,-9.646 9.96,-6.004 11.01,-4.954 11.3,-4.954 ; v1(10.439,-4.154) 11.3,-4.154 ; 10.642,-11.077 10.642,-9.962 11.147,-9.962 12.1,-9.009 12.1,-5.754 12.1,-5.554 U4.M1@12.09,-5.544 ; J6.2@18.525,-17.7 18.525,-16.429 v1(18.539,-16.415) ; J1.13@24.645,-9.25 26.129,-9.25 26.39,-9.511 v1@26.421,-9.48 ; J1.17@24.645,-8.25 26.42,-8.25 ; J1.23@24.645,-6.75 26.15,-6.75 26.421,-7.021 26.421,-8.251 v1@26.421,-9.48 ; J1.33@24.645,-4.25 25.635,-4.25 ; J1.47@24.645,-0.75 25.922,-0.75 v1(26.465,-1.294) ; J1.51@24.645,0.25 24.795,0.1 v1(26.5,0.1) ; v1(26.421,-9.511) v1@26.421,-9.48 ; v1(26.494,-2.25) J1.42@28.095,-2.25 ; v1(26.5,-12.236) 26.514,-12.25 J1.2@28.095,-12.25 ; J1.16@28.095,-8.75 27.151,-8.75 v1@26.421,-9.48
  INT1 w0.2: J7.1@10.546,-0.439 12.854,-0.439 15.92,-3.505 15.92,-7.215 ; 19.043,-10.337 21.478,-10.337 21.974,-10.833 v1(22.755,-10.833)
  Bottom w0.2: J3.10@-6.117,-17.596 J3.10@-6.117,-16.561 ; J3.10@-6.117,-15.661 -6.068,-15.711 -3.734,-15.711 ; -5.359,16.6 -4.532,16.6 -4.504,16.628 ; J7.1@9.45,0.378 9.45,0.324 J7.1@10.079,0.324 ; 22.749,-9.904 22.755,-9.91 v1(22.755,-10.833) ; v1(26.494,3.791) 26.494,4.436
  other v1: 7.3,-18.289 -19.434,-18.147 -20.875,-14.402 -16.7,-14.4 29.4,-14.21 -14.248,-13.974 -7.2,-13.9 10.209,-13.117 -17.3,-12.9 29.4,-11.118 6.919,-10.166 0.659,-10.012 -30.5,-9.2 -15.9,-9 14.85,-8.865 -8.251,-8.833 -8.775,-4.393 19.98,-4.25 5.492,-3.92 5.1,-3.4 6.002,-3.357 -15.854,-3.125 -8.775,-3.081 17.866,-2.7 29.4,-1.338 -23.4,-0.5 0,0 19.52,0.812 12.703,1.427 0,2 3.767,2.085 11.219,2.123 -21.983,2.572 10.736,2.689 29.4,2.849 -26.7,3.3 11.069,3.607 19.042,3.607 16.9,3.73 -20.589,4.1 29.4,5.093 13.423,5.561 9.403,6.651 -26.3,7.7 17.71,7.7 18.525,8.918 -30.4,9.4 5.904,9.426 4.477,9.485 -3.686,9.79 -1.34,9.915 17.772,10.377 -8.095,10.442 -26.2,10.7 -18.2,11 -21,11.9 23.427,13.293 2.899,13.343 -13.185,14.588 -18.1,14.8 -0.884,17.628 17.564,18.075 1.6,21.2
HDMI_INT: J1.24
HDMI_RSTN: J2.55
HP_INSERT_DET: J1.80
IIC_CLK: J2.25 U16.6
IIC_SDA: J2.23 U16.5
INT_N: Q3.2 U4.34
IR_ANODE: C33.1 D4.2 LD1.1
IR_CATHODE: LD4.2 R68.1 U12.6
KEY_1: J1.54 R6.1 R7.1 | length 15.5
  Top w0.2: J1.54@28.095,0.75 v1(29.2,0.75)
  INT1 w0.2: 22.97,6.05 22.974,6.046 v1(22.974,5.774) 23.246,5.774 26.028,2.992 26.958,2.992 v1(29.2,0.75)
  Bottom w0.2: 22.97,9.579 22.974,9.583 22.974,10.246 22.977,10.25 22.977,6.055 22.974,6.053 v1(22.974,5.774) 22.977,5.1
KEY_2: J1.56
LCD_EN: J1.46
LCD_RST: J1.44
LED0: J3.7 Q1.3 R1.1
LED1: J3.8 Q2.3 R2.1
LED_AD0: R34.2 U4.35
LED_GN: Q2.1 R3.1 R5.1
LED_MLINK: Q1.1 R4.1
LX_1V2: BC13.1 BC17.1 FB3.1 FB4.1 L4.1
MCLK: R55.2 U17.23
MDI0N: T1.3 U4.3
MDI0P: T1.1 U4.2